# EAGLE board board1 (EAGLE 9.4.2)
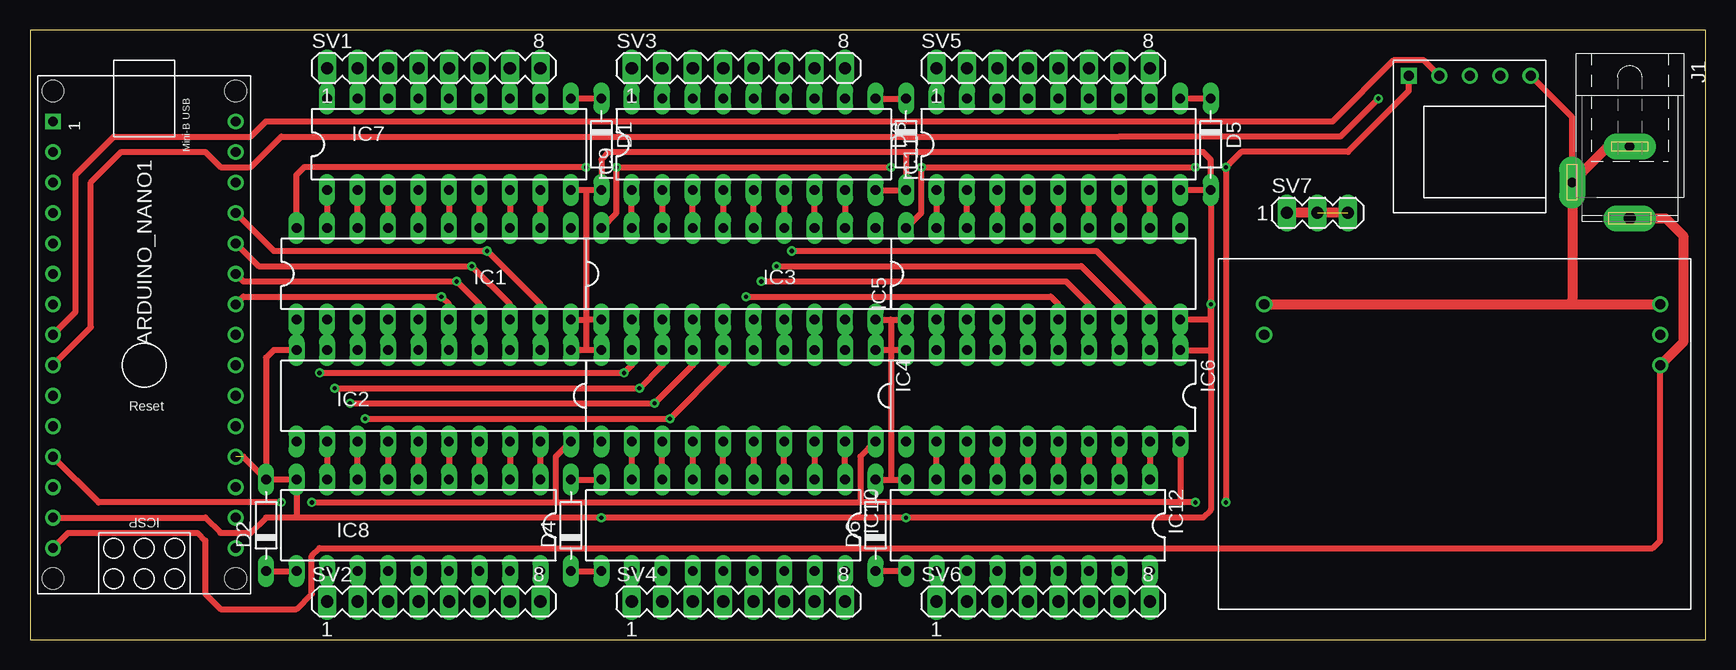
[diagram p0: board, top side]
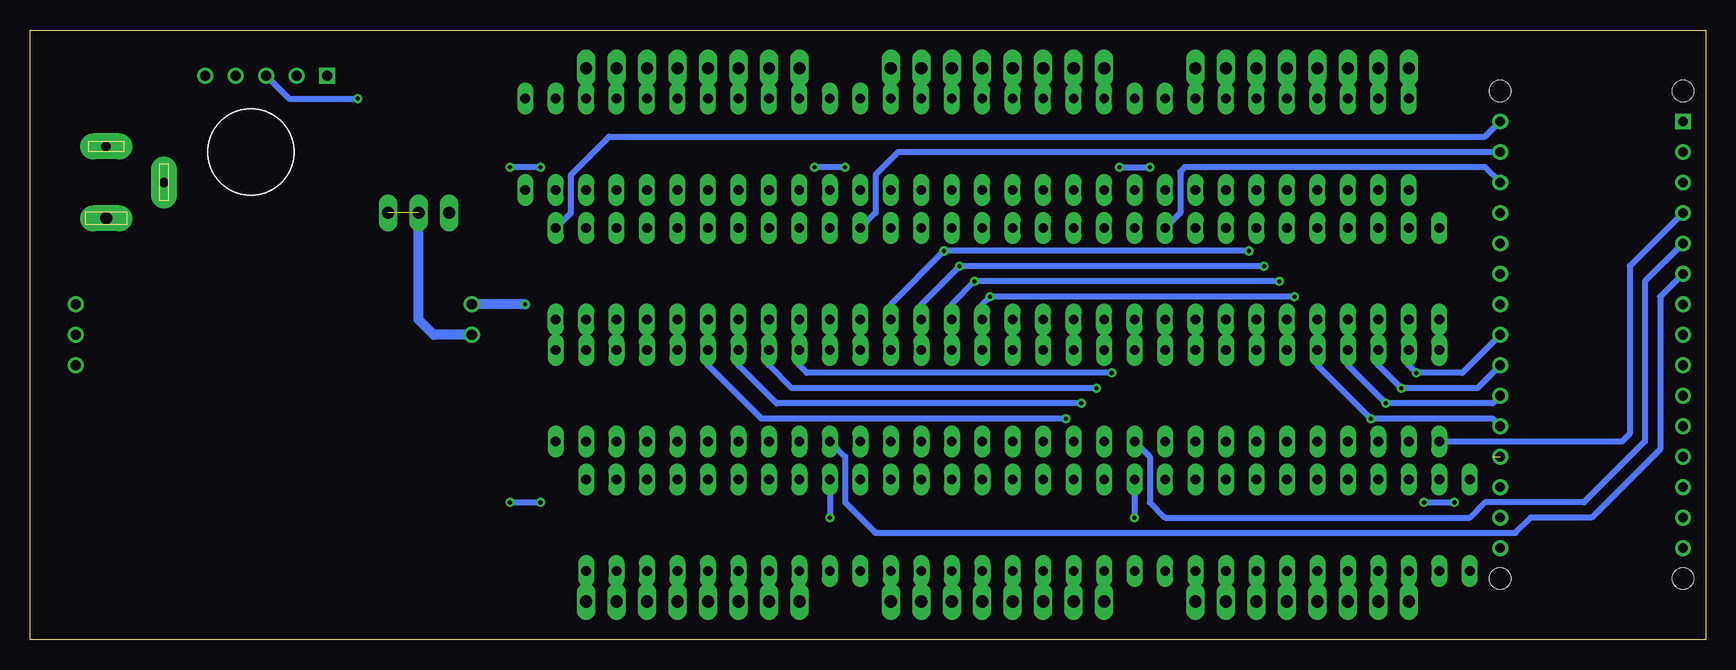
[diagram p1: board, bottom side, seen from below]

Size 139.7 x 50.8 mm. Coordinates in mm from the lower left corner, seen from the top.
Outline: 0,0 139.7,0 139.7,50.8 0,50.8 0,0
Copper layers (1*16): Top 0.035mm / dielectric 1.5mm / Bottom 0.035mm
Design rules "default": minimum track width 6mil, minimum drill 0.35mm, track to track 6mil, track to pad 6mil, pad to pad 6mil, via to via 6mil, smd to smd 6mil, copper to edge 40mil, drill to drill 6mil, minimum pad ring 10mil, minimum via ring 8mil, stop-mask expansion 4mil, vias tented up to drill 0mil, thermal gap 10mil

## Footprints (pad centres in the part's own frame; a part is rotated, then mirrored left to right if it is on the bottom)
ARDUINO_NANO = drill 0.8 square: 1 -20.32,-7.62 | drill 0.8: 2 -17.78,-7.62; 3 -15.24,-7.62; 4 -12.7,-7.62; 5 -10.16,-7.62; 6 -7.62,-7.62; 7 -5.08,-7.62; 8 -2.54,-7.62; 9 0,-7.62; 10 2.54,-7.62; 11 5.08,-7.62; 12 7.62,-7.62; 13 10.16,-7.62; 14 12.7,-7.62; 15 15.24,-7.62; 16 15.24,7.62; 17 12.7,7.62; 18 10.16,7.62; 19 7.62,7.62; 20 5.08,7.62; 21 2.54,7.62; 22 0,7.62; 23 -2.54,7.62; 24 -5.08,7.62; 25 -7.62,7.62; 26 -10.16,7.62; 27 -12.7,7.62; 28 -15.24,7.62; 29 -17.78,7.62; 30 -20.32,7.62 | hole 1.778: -22.86,-7.62; -22.86,7.62; 17.78,7.62; 17.78,-7.62
D-7.5 = drill 0.813 long: A 3.81,0; C -3.81,0
DIL20 = drill 0.813 long: 1 -11.43,-3.81; 2 -8.89,-3.81; 3 -6.35,-3.81; 4 -3.81,-3.81; 5 -1.27,-3.81; 6 1.27,-3.81; 7 3.81,-3.81; 8 6.35,-3.81; 9 8.89,-3.81; 10 11.43,-3.81; 11 11.43,3.81; 12 8.89,3.81; 13 6.35,3.81; 14 3.81,3.81; 15 1.27,3.81; 16 -1.27,3.81; 17 -3.81,3.81; 18 -6.35,3.81; 19 -8.89,3.81; 20 -11.43,3.81
DIL18 = drill 0.813 long: 1 -10.16,-3.81; 2 -7.62,-3.81; 3 -5.08,-3.81; 4 -2.54,-3.81; 5 0,-3.81; 6 2.54,-3.81; 7 5.08,-3.81; 8 7.62,-3.81; 9 10.16,-3.81; 10 10.16,3.81; 11 7.62,3.81; 12 5.08,3.81; 13 2.54,3.81; 14 0,3.81; 15 -2.54,3.81; 16 -5.08,3.81; 17 -7.62,3.81; 18 -10.16,3.81
SPC4077 = drill 0.8 pad 2.184 long: 1 -3,0; 2 0,-4.8 | drill 1 pad 2.184 long: 3 3,0
MA08-1 = drill 1.016 long: 1 -8.89,0; 2 -6.35,0; 3 -3.81,0; 4 -1.27,0; 5 1.27,0; 6 3.81,0; 7 6.35,0; 8 8.89,0
MA03-1 = drill 1.016 long: 1 -2.54,0; 2 0,0; 3 2.54,0
DS3231_MINI_MODULE = drill 0.85 square: 1 5.08,-5.08 | drill 0.85: 2 2.54,-5.08; 3 0,-5.08; 4 -2.54,-5.08; 5 -5.08,-5.08
MAX1771_NIXIE_MODULE = drill 0.85: 1 2.54,8.89; 2 2.54,6.35; 3 2.54,3.81; 4 35.56,3.81; 5 35.56,6.35

## Placement (x,y rotation side)
ARDUINO_NANO1  [ARDUINO_NANO]  9.53,22.86 270 top
D1  [D-7.5]  47.62,41.27 270 top
D2  [D-7.5]  19.68,9.53 90 top
D3  [D-7.5]  73.03,41.27 270 top
D4  [D-7.5]  45.09,9.53 90 top
D5  [D-7.5]  98.42,41.27 270 top
D6  [D-7.5]  70.48,9.53 90 top
IC1  74HC573N  [DIL20]  33.66,30.48 0 top
IC2  74HC573N  [DIL20]  33.66,20.32 180 top
IC3  74HC573N  [DIL20]  59.05,30.48 0 top
IC4  74HC573N  [DIL20]  59.05,20.32 180 top
IC5  74HC573N  [DIL20]  84.45,30.48 0 top
IC6  74HC573N  [DIL20]  84.45,20.32 180 top
IC7  [DIL18]  34.92,41.27 0 top
IC8  [DIL18]  32.38,9.53 180 top
IC9  [DIL18]  60.33,41.27 0 top
IC10  [DIL18]  57.78,9.53 180 top
IC11  [DIL18]  85.72,41.27 0 top
IC12  [DIL18]  83.19,9.53 180 top
J1  [SPC4077]  133.35,38.1 270 top
SV1  [MA08-1]  33.66,47.62 0 top
SV2  [MA08-1]  33.66,3.17 0 top
SV3  [MA08-1]  59.05,47.62 0 top
SV4  [MA08-1]  59.05,3.17 0 top
SV5  [MA08-1]  84.45,47.62 0 top
SV6  [MA08-1]  84.45,3.17 0 top
SV7  [MA03-1]  107.31,35.56 0 top
U$1  DS3231_MINI_MODULE  [DS3231_MINI_MODULE]  120.02,41.91 180 top
U$2  MAX1771_NIXIE_MODULE  [MAX1771_NIXIE_MODULE]  138.43,31.75 180 top

## Library data of the parts
ARDUINO_NANO1 = ArduinoNanoV30
D1-D6 = diode
IC1-IC6 = 74xx-eu
IC7-IC12 = uln-udn
J1 = con-jack; OC_FARNELL: unknown; OC_NEWARK: unknown
SV1-SV7 = con-lstb; OC_FARNELL: unknown; OC_NEWARK: unknown
U$1 U$2 = random

## Nets
+12V: ARDUINO_NANO1.15 J1.3 U$2.1
CS1: ARDUINO_NANO1.28 IC1.11
CS2: ARDUINO_NANO1.4 IC2.11
CS3: ARDUINO_NANO1.29 IC3.11
CS4: ARDUINO_NANO1.5 IC4.11
CS5: ARDUINO_NANO1.30 IC5.11
CS6: ARDUINO_NANO1.6 IC6.11
D1: ARDUINO_NANO1.23 IC1.2 IC2.9 IC3.2 IC4.9 IC5.2 IC6.9
D2: ARDUINO_NANO1.22 IC1.3 IC2.8 IC3.3 IC4.8 IC5.3 IC6.8
D3: ARDUINO_NANO1.21 IC1.4 IC2.7 IC3.4 IC4.7 IC5.4 IC6.7
D4: ARDUINO_NANO1.20 IC1.5 IC2.6 IC3.5 IC4.6 IC5.5 IC6.6
D5: ARDUINO_NANO1.24 IC1.6 IC2.5 IC3.6 IC4.5 IC5.6 IC6.5
D6: ARDUINO_NANO1.25 IC1.7 IC2.4 IC3.7 IC4.4 IC5.7 IC6.4
D7: ARDUINO_NANO1.26 IC1.8 IC2.3 IC3.8 IC4.3 IC5.8 IC6.3
D8: ARDUINO_NANO1.27 IC1.9 IC2.2 IC3.9 IC4.2 IC5.9 IC6.2
GND: ARDUINO_NANO1.14 ARDUINO_NANO1.19 D1.A D2.A D3.A D4.A D5.A D6.A IC1.1 IC1.10 IC2.1 IC2.10 IC3.1 IC3.10 IC4.1 IC4.10 IC5.1 IC5.10 IC6.1 IC6.10 IC7.9 IC8.9 IC9.9 IC10.9 IC11.9 IC12.9 J1.1 J1.2 U$1.5 U$2.3 U$2.4
N$1: IC2.19 IC8.1
N$2: IC2.18 IC8.2
N$3: IC2.17 IC8.3
N$4: IC2.16 IC8.4
N$5: IC2.15 IC8.5
N$6: IC2.14 IC8.6
N$7: IC2.13 IC8.7
N$8: IC2.12 IC8.8
N$9: IC1.19 IC7.1
N$10: IC1.18 IC7.2
N$11: IC1.17 IC7.3
N$12: IC1.16 IC7.4
N$13: IC1.15 IC7.5
N$14: IC1.14 IC7.6
N$15: IC1.13 IC7.7
N$16: IC1.12 IC7.8
N$17: IC3.19 IC9.1
N$18: IC3.18 IC9.2
N$19: IC3.17 IC9.3
N$20: IC3.16 IC9.4
N$21: IC3.15 IC9.5
N$22: IC3.14 IC9.6
N$23: IC3.13 IC9.7
N$24: IC3.12 IC9.8
N$25: IC4.19 IC10.1
N$26: IC4.18 IC10.2
N$27: IC4.17 IC10.3
N$28: IC4.16 IC10.4
N$29: IC4.15 IC10.5
N$30: IC4.14 IC10.6
N$31: IC4.13 IC10.7
N$32: IC4.12 IC10.8
N$33: IC5.19 IC11.1
N$34: IC5.18 IC11.2
N$35: IC5.17 IC11.3
N$36: IC5.16 IC11.4
N$37: IC5.15 IC11.5
N$38: IC5.14 IC11.6
N$39: IC5.13 IC11.7
N$40: IC5.12 IC11.8
N$41: IC6.19 IC12.1
N$42: IC6.18 IC12.2
N$43: IC6.17 IC12.3
N$44: IC6.16 IC12.4
N$45: IC6.15 IC12.5
N$46: IC6.14 IC12.6
N$47: IC6.13 IC12.7
N$48: IC6.12 IC12.8
N$49: IC7.18 SV1.1
N$50: IC7.17 SV1.2
N$51: IC7.16 SV1.3
N$52: IC7.15 SV1.4
N$53: IC7.14 SV1.5
N$54: IC7.13 SV1.6
N$55: IC7.12 SV1.7
N$56: IC7.11 SV1.8
N$57: IC8.18 SV2.8
N$58: IC8.17 SV2.7
N$59: IC8.16 SV2.6
N$60: IC8.15 SV2.5
N$61: IC8.14 SV2.4
N$62: IC8.13 SV2.3
N$63: IC8.12 SV2.2
N$64: IC8.11 SV2.1
N$65: IC9.18 SV3.1
N$66: IC9.17 SV3.2
N$67: IC9.16 SV3.3
N$68: IC9.15 SV3.4
N$69: IC9.14 SV3.5
N$70: IC9.13 SV3.6
N$71: IC9.12 SV3.7
N$72: IC9.11 SV3.8
N$73: IC10.18 SV4.8
N$74: IC10.17 SV4.7
N$75: IC10.16 SV4.6
N$76: IC10.15 SV4.5
N$77: IC10.14 SV4.4
N$78: IC10.13 SV4.3
N$79: IC10.12 SV4.2
N$80: IC10.11 SV4.1
N$81: IC11.18 SV5.1
N$82: IC11.17 SV5.2
N$83: IC11.16 SV5.3
N$84: IC11.15 SV5.4
N$85: IC11.14 SV5.5
N$86: IC11.13 SV5.6
N$87: IC11.12 SV5.7
N$88: IC11.11 SV5.8
N$89: IC12.18 SV6.8
N$90: IC12.17 SV6.7
N$91: IC12.16 SV6.6
N$92: IC12.15 SV6.5
N$93: IC12.14 SV6.4
N$94: IC12.13 SV6.3
N$95: IC12.12 SV6.2
N$96: IC12.11 SV6.1
N$97: ARDUINO_NANO1.8 U$1.2
N$98: D1.C IC7.10
N$99: ARDUINO_NANO1.9 U$1.3
N$100: D2.C IC8.10
N$101: SV7.1 SV7.2 SV7.3 U$2.5
N$102: D3.C IC9.10
N$104: D4.C IC10.10
N$106: D5.C IC11.10
N$108: D6.C IC12.10
VCC: ARDUINO_NANO1.12 IC1.20 IC2.20 IC3.20 IC4.20 IC5.20 IC6.20 U$1.1

## Tracks (layer width: path | path; a pad name or v marks a point on that pad's centre or on a via)
+12V
  Top 0.508: ARDUINO_NANO1.15 3.17,8.89 13.97,8.89 14.61,8.26 14.61,3.81 15.88,2.54 22.23,2.54 23.5,3.81 23.5,6.99 24.13,7.62 135.25,7.62 135.89,8.26 U$2.1
  Top 0.813: J1.3 136.35,35.1 137.79,33.66 137.79,24.77 U$2.1
CS1
  Bottom 0.508: ARDUINO_NANO1.28 18.41,39.37 43.44,39.37 43.81,39 43.81,35.56 IC1.11
CS2
  Bottom 0.508: IC2.11 6.99,16.51 6.35,17.14 6.35,31.11 ARDUINO_NANO1.4
CS3
  Bottom 0.508: IC3.11 69.22,35.56 69.22,38.73 67.31,40.64 ARDUINO_NANO1.29
CS4
  Bottom 0.508: ARDUINO_NANO1.5 5.08,29.84 5.08,16.51 10.16,11.43 18.41,11.43 19.68,10.16 45.09,10.16 46.35,11.43 46.35,15.24 IC4.11
CS5
  Bottom 0.508: IC5.11 94.61,35.56 94.61,38.73 91.44,41.91 18.41,41.91 ARDUINO_NANO1.30
CS6
  Bottom 0.508: ARDUINO_NANO1.6 3.81,28.57 3.81,15.88 9.53,10.16 14.61,10.16 15.88,8.89 69.22,8.89 71.75,11.43 71.75,15.24 IC6.11
D1  (via drill 0.35)
  Top 0.508: IC5.2 IC6.9 | IC1.2 IC2.9 | IC3.2 IC4.9 50.16,22.86 v49.53,22.23 v24.13,22.23
  Bottom 0.508: IC2.9 24.77,22.86 v24.13,22.23 20.32,22.23 ARDUINO_NANO1.23 | v49.53,22.23 74.93,22.23 75.56,22.86 IC6.9
D2  (via drill 0.35)
  Top 0.508: IC6.8 IC5.3 | IC2.8 IC1.3 | IC3.3 IC4.8 52.7,22.86 v50.8,20.95 v25.4,20.95
  Bottom 0.508: IC2.8 27.3,22.86 v25.4,20.95 19.05,20.95 ARDUINO_NANO1.22 | v50.8,20.95 76.2,20.95 78.11,22.86 IC6.8
D3  (via drill 0.35)
  Top 0.508: IC5.4 IC6.7 | IC1.4 IC2.7 | IC3.4 IC4.7 55.24,22.86 v52.07,19.68 v26.67,19.68
  Bottom 0.508: IC2.7 29.84,22.86 v26.67,19.68 17.78,19.68 ARDUINO_NANO1.21 | v52.07,19.68 77.47,19.68 80.64,22.86 IC6.7
D4  (via drill 0.35)
  Top 0.508: IC6.6 IC5.5 | IC2.6 IC1.5 | IC3.5 IC4.6 57.78,22.86 v53.34,18.41 v27.94,18.41
  Bottom 0.508: IC2.6 32.38,22.86 v27.94,18.41 17.78,18.41 ARDUINO_NANO1.20 | v53.34,18.41 78.74,18.41 83.19,22.86 IC6.6
D5  (via drill 0.35)
  Top 0.508: IC6.5 IC5.6 85.72,27.94 85.09,28.57 v59.69,28.57 | IC2.5 IC1.6 34.92,27.94 v34.29,28.57 17.78,28.57 ARDUINO_NANO1.24 | IC4.5 IC3.6
  Bottom 0.508: v34.29,28.57 v59.69,28.57 60.33,27.94 IC3.6
D6  (via drill 0.35)
  Top 0.508: IC6.4 IC5.7 88.27,27.94 86.36,29.84 v60.96,29.84 | IC2.4 IC1.7 37.47,27.94 v35.56,29.84 17.78,29.84 ARDUINO_NANO1.25 | IC3.7 IC4.4
  Bottom 0.508: v35.56,29.84 v60.96,29.84 62.87,27.94 IC3.7
D7  (via drill 0.35)
  Top 0.508: IC6.3 IC5.8 90.81,27.94 87.63,31.11 v62.23,31.11 | IC2.3 IC1.8 40.01,27.94 v36.83,31.11 19.05,31.11 ARDUINO_NANO1.26 | IC4.3 IC3.8
  Bottom 0.508: v36.83,31.11 v62.23,31.11 65.41,27.94 IC3.8
D8  (via drill 0.35)
  Top 0.508: IC6.2 IC5.9 93.34,27.94 88.9,32.38 v63.5,32.38 | IC2.2 IC1.9 42.55,27.94 v38.1,32.38 20.32,32.38 ARDUINO_NANO1.27 | IC3.9 IC4.2
  Bottom 0.508: v38.1,32.38 v63.5,32.38 67.94,27.94 IC3.9
GND  (via drill 0.35)  (1 unrouted)
  Top 0.508: D5.A IC11.9 | D5.A v98.42,27.94 | IC5.10 98.42,26.67 v98.42,27.94 | IC4.10 46.35,24.13 | 46.35,24.13 IC2.1 | IC1.10 46.35,26.67 | IC3.1 46.35,26.67 | IC1.1 IC2.10 20.32,24.13 19.68,23.5 D2.A | 46.35,37.47 D1.A 47.62,40.01 48.26,40.64 73.03,40.64 | 46.35,37.47 IC7.9 | IC9.9 D3.A 73.03,40.64 | IC6.1 98.42,24.13 | D2.A IC8.9 22.23,10.16 | D2.A 17.78,15.24 | D5.A 98.42,40.01 97.79,40.64 73.03,40.64 | v98.42,27.94 98.42,24.13 | 98.42,24.13 98.42,10.79 97.79,10.16 v73.03,10.16 v47.62,10.16 22.23,10.16 | 22.23,10.16 19.68,10.16 18.41,8.89 15.88,8.89 14.61,10.16 ARDUINO_NANO1.14 | IC3.10 71.75,26.67 | 71.75,26.67 IC5.1 | IC6.10 71.75,24.13 | 71.75,24.13 IC4.1 | D4.A IC10.9 | 46.35,37.47 46.35,26.67 | D6.A 71.75,13.34 | 71.75,13.34 IC12.9 | 46.35,26.67 46.35,24.13 | 71.75,26.67 71.75,24.13 | 71.75,24.13 71.75,13.34 | J1.2 128.55,43.53 U$1.5
  Top 0.813: 129.19,38.1 J1.2 | U$2.4 128.27,27.94 | 128.27,27.94 U$2.3 | J1.2 128.55,28.22 128.27,27.94 | J1.2 131.55,41.1 J1.1
  Bottom 0.508: IC10.9 v47.62,10.16 | IC12.9 v73.03,10.16
  Bottom 0.813: v98.42,27.94 U$2.4
N$1
  Top 0.508: IC8.1 IC2.19
N$2
  Top 0.508: IC2.18 IC8.2
N$3
  Top 0.508: IC8.3 IC2.17
N$4
  Top 0.508: IC2.16 IC8.4
N$5
  Top 0.508: IC8.5 IC2.15
N$6
  Top 0.508: IC2.14 IC8.6
N$7
  Top 0.508: IC8.7 IC2.13
N$8
  Top 0.508: IC2.12 IC8.8
N$9
  Top 0.508: IC7.1 IC1.19
N$10
  Top 0.508: IC1.18 IC7.2
N$11
  Top 0.508: IC7.3 IC1.17
N$12
  Top 0.508: IC1.16 IC7.4
N$13
  Top 0.508: IC7.5 IC1.15
N$14
  Top 0.508: IC1.14 IC7.6
N$15
  Top 0.508: IC7.7 IC1.13
N$16
  Top 0.508: IC1.12 IC7.8
N$17
  Top 0.508: IC3.19 IC9.1
N$18
  Top 0.508: IC9.2 IC3.18
N$19
  Top 0.508: IC3.17 IC9.3
N$20
  Top 0.508: IC9.4 IC3.16
N$21
  Top 0.508: IC3.15 IC9.5
N$22
  Top 0.508: IC9.6 IC3.14
N$23
  Top 0.508: IC3.13 IC9.7
N$24
  Top 0.508: IC9.8 IC3.12
N$25
  Top 0.508: IC10.1 IC4.19
N$26
  Top 0.508: IC4.18 IC10.2
N$27
  Top 0.508: IC10.3 IC4.17
N$28
  Top 0.508: IC4.16 IC10.4
N$29
  Top 0.508: IC10.5 IC4.15
N$30
  Top 0.508: IC4.14 IC10.6
N$31
  Top 0.508: IC10.7 IC4.13
N$32
  Top 0.508: IC4.12 IC10.8
N$33
  Top 0.508: IC11.1 IC5.19
N$34
  Top 0.508: IC5.18 IC11.2
N$35
  Top 0.508: IC11.3 IC5.17
N$36
  Top 0.508: IC5.16 IC11.4
N$37
  Top 0.508: IC11.5 IC5.15
N$38
  Top 0.508: IC5.14 IC11.6
N$39
  Top 0.508: IC11.7 IC5.13
N$40
  Top 0.508: IC5.12 IC11.8
N$41
  Top 0.508: IC6.19 IC12.1
N$42
  Top 0.508: IC12.2 IC6.18
N$43
  Top 0.508: IC6.17 IC12.3
N$44
  Top 0.508: IC12.4 IC6.16
N$45
  Top 0.508: IC6.15 IC12.5
N$46
  Top 0.508: IC12.6 IC6.14
N$47
  Top 0.508: IC6.13 IC12.7
N$48
  Top 0.508: IC12.8 IC6.12
N$49
  Top 0.508: IC7.18 SV1.1
N$50
  Top 0.508: SV1.2 IC7.17
N$51
  Top 0.508: IC7.16 SV1.3
N$52
  Top 0.508: SV1.4 IC7.15
N$53
  Top 0.508: IC7.14 SV1.5
N$54
  Top 0.508: SV1.6 IC7.13
N$55
  Top 0.508: IC7.12 SV1.7
N$56
  Top 0.508: SV1.8 IC7.11
N$57
  Top 0.508: IC8.18 SV2.8
N$58
  Top 0.508: SV2.7 IC8.17
N$59
  Top 0.508: IC8.16 SV2.6
N$60
  Top 0.508: SV2.5 IC8.15
N$61
  Top 0.508: IC8.14 SV2.4
N$62
  Top 0.508: SV2.3 IC8.13
N$63
  Top 0.508: IC8.12 SV2.2
N$64
  Top 0.508: SV2.1 IC8.11
N$65
  Top 0.508: SV3.1 IC9.18
N$66
  Top 0.508: IC9.17 SV3.2
N$67
  Top 0.508: SV3.3 IC9.16
N$68
  Top 0.508: IC9.15 SV3.4
N$69
  Top 0.508: SV3.5 IC9.14
N$70
  Top 0.508: IC9.13 SV3.6
N$71
  Top 0.508: SV3.7 IC9.12
N$72
  Top 0.508: IC9.11 SV3.8
N$73
  Top 0.508: IC10.18 SV4.8
N$74
  Top 0.508: SV4.7 IC10.17
N$75
  Top 0.508: IC10.16 SV4.6
N$76
  Top 0.508: SV4.5 IC10.15
N$77
  Top 0.508: IC10.14 SV4.4
N$78
  Top 0.508: SV4.3 IC10.13
N$79
  Top 0.508: IC10.12 SV4.2
N$80
  Top 0.508: SV4.1 IC10.11
N$81
  Top 0.508: SV5.1 IC11.18
N$82
  Top 0.508: IC11.17 SV5.2
N$83
  Top 0.508: SV5.3 IC11.16
N$84
  Top 0.508: IC11.15 SV5.4
N$85
  Top 0.508: SV5.5 IC11.14
N$86
  Top 0.508: IC11.13 SV5.6
N$87
  Top 0.508: SV5.7 IC11.12
N$88
  Top 0.508: IC11.11 SV5.8
N$89
  Top 0.508: IC12.18 SV6.8
N$90
  Top 0.508: SV6.7 IC12.17
N$91
  Top 0.508: IC12.16 SV6.6
N$92
  Top 0.508: SV6.5 IC12.15
N$93
  Top 0.508: IC12.14 SV6.4
N$94
  Top 0.508: SV6.3 IC12.13
N$95
  Top 0.508: IC12.12 SV6.2
N$96
  Top 0.508: SV6.1 IC12.11
N$97
  Top 0.508: ARDUINO_NANO1.8 3.81,27.3 3.81,38.73 6.99,41.91 18.41,41.91 19.68,43.18 108.58,43.18 113.67,48.26 116.2,48.26 U$1.2
N$98
  Top 0.508: D1.C IC7.10
N$99  (via drill 0.35)
  Top 0.508: ARDUINO_NANO1.9 5.08,26.04 5.08,38.1 7.62,40.64 14.61,40.64 15.88,39.37 18.41,39.37 20.95,41.91 90.81,41.91 91.44,41.91 109.22,41.91 v112.39,45.09
  Bottom 0.508: U$1.3 118.11,45.09 v112.39,45.09
N$100
  Top 0.508: D2.C IC8.10
N$101  (1 unrouted)
  Top 0.813: SV7.3 SV7.1
  Bottom 0.813: SV7.2 107.31,26.67 106.05,25.4 U$2.5
N$102
  Top 0.508: IC9.10 D3.C
N$104
  Top 0.508: D4.C IC10.10
N$106
  Top 0.508: D5.C IC11.10
N$108
  Top 0.508: IC12.10 D6.C
VCC  (via drill 0.35)
  Top 0.508: IC1.20 22.23,38.73 22.86,39.37 v46.35,39.37 | v97.16,11.43 95.89,11.43 | IC6.20 95.89,11.43 | v99.69,11.43 v99.69,39.37 100.97,40.64 109.86,40.64 114.94,45.72 U$1.1 | 95.89,11.43 69.22,11.43 | v23.5,11.43 43.81,11.43 | ARDUINO_NANO1.12 5.71,11.43 v20.95,11.43 | IC2.20 43.81,15.24 43.81,11.43 | 43.81,11.43 69.22,11.43 | IC3.20 48.9,35.56 v48.9,39.37 v71.75,39.37 | IC4.20 69.22,15.24 69.22,11.43 | v97.16,39.37 v74.3,39.37 74.3,35.56 IC5.20
  Bottom 0.508: v97.16,39.37 v99.69,39.37 | v99.69,11.43 v97.16,11.43 | v23.5,11.43 v20.95,11.43 | v48.9,39.37 v46.35,39.37 | v71.75,39.37 v74.3,39.37